# Altium PCB PCB_conectores.PcbDoc
Units mm, origin at the board's own origin, x right, y up, seen from the top; angles counter-clockwise.
Board outline 50 x 50 mm, 2 copper layers (Top Layer, Bottom Layer); 17 components, 10 nets, 62 pads, 16 vias.
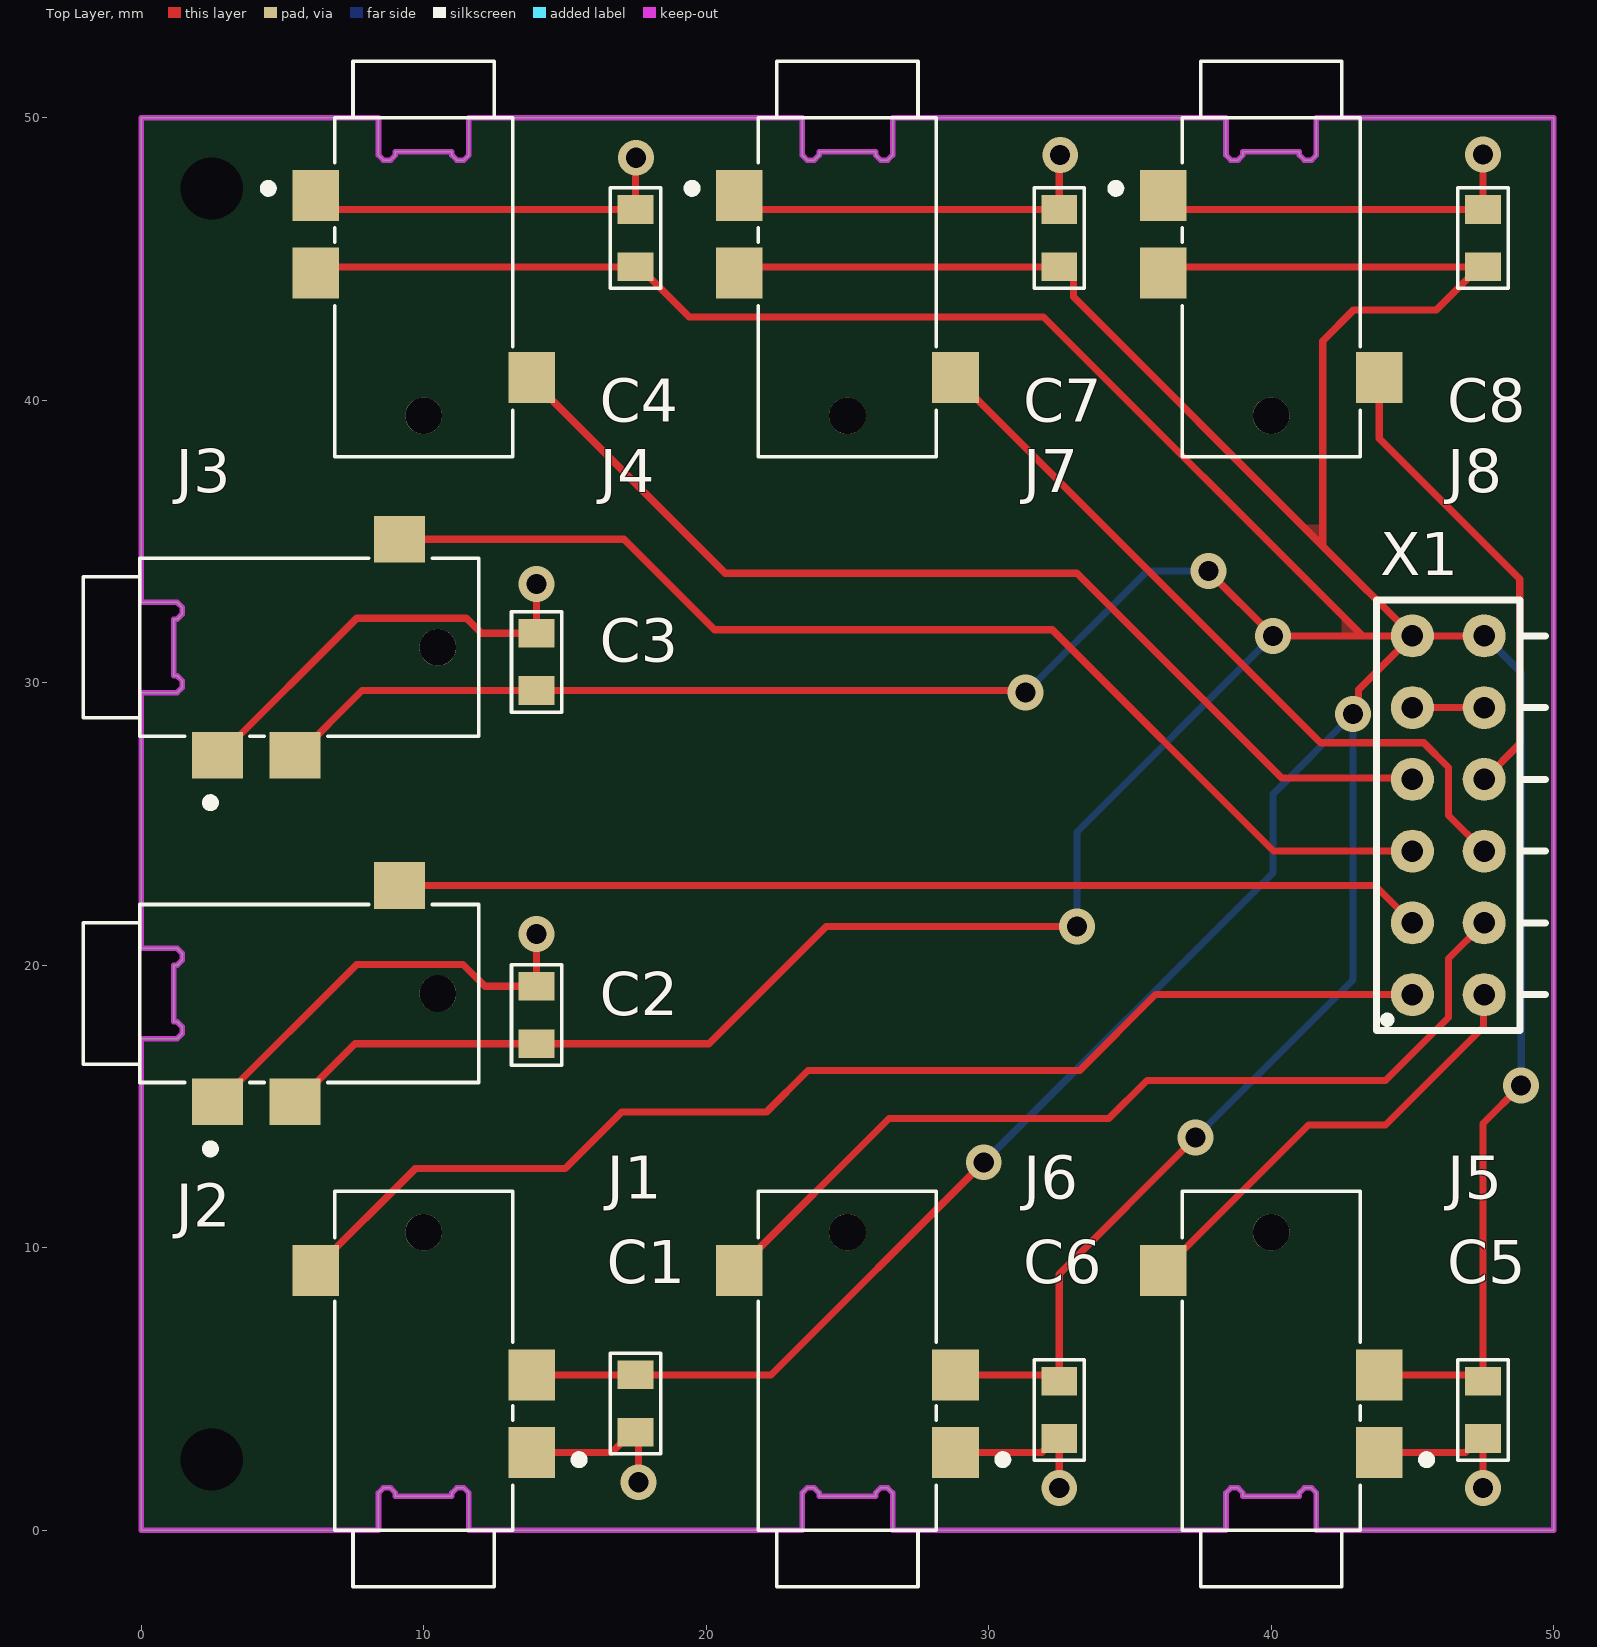
[diagram p0: Top Layer view]
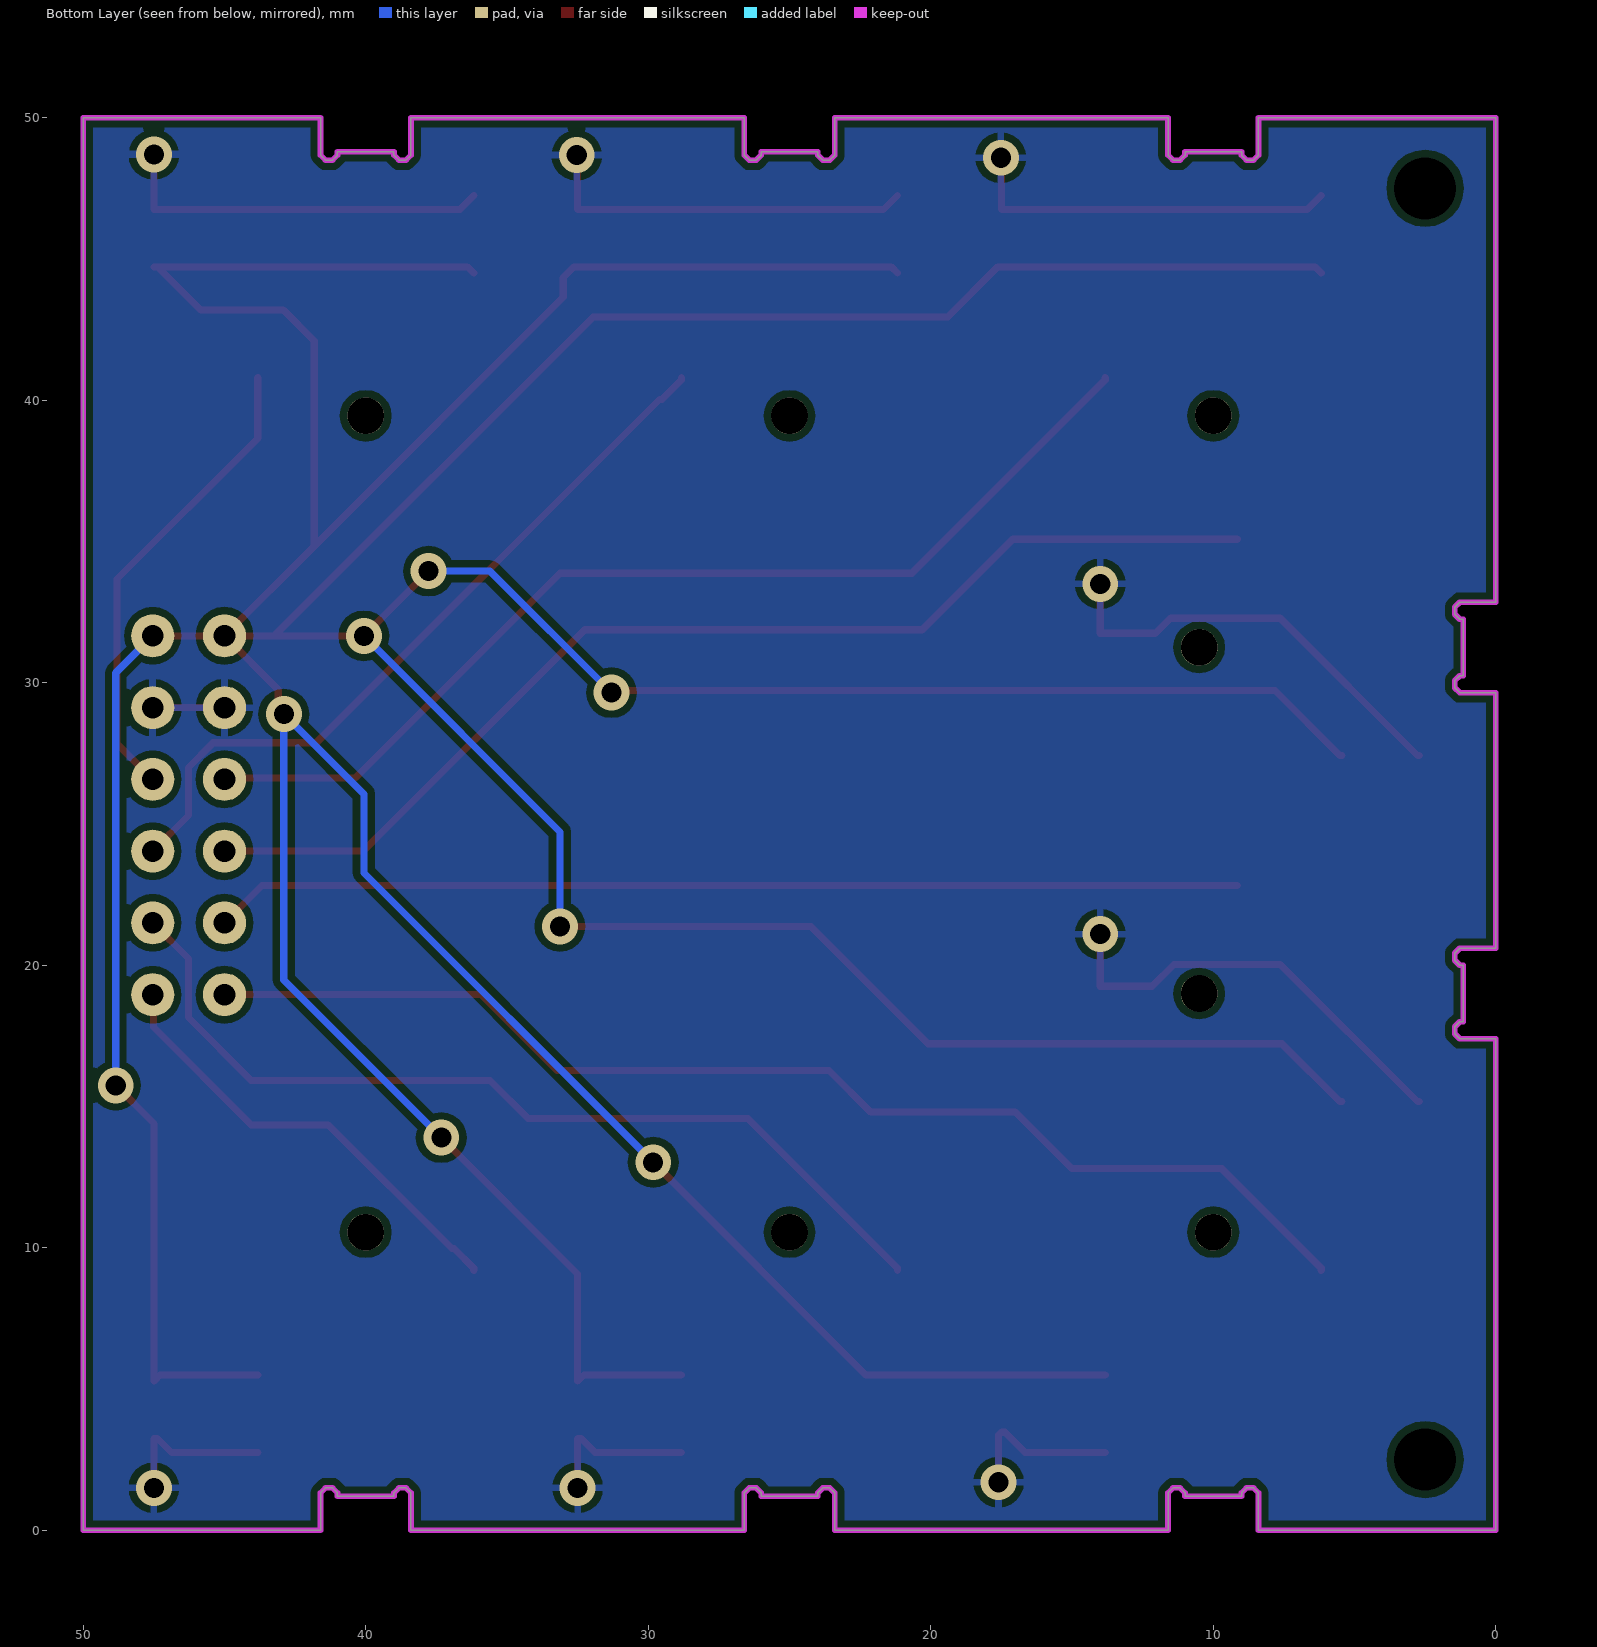
[diagram p1: Bottom Layer view, seen from below]

## Layer stack, top to bottom
Top Solder: solder mask 0.0102, Solder Resist, Dk 3.5
Top Layer: signal copper 0.0356
Dielectric 1: dielectric 0.32, FR-4, Dk 4.8
Bottom Layer: signal copper 0.0356
Bottom Solder: solder mask 0.0102, Solder Resist, Dk 3.5

## Board outline
8.4,50 8.4,48.675 8.575,48.5 8.825,48.5 9,48.675 9,48.8 11,48.8 11,48.675 11.175,48.5 11.425,48.5 11.6,48.675 11.6,50 23.4,50 23.4,48.675 23.575,48.5 23.825,48.5 24,48.675 24,48.8 26,48.8 26,48.675 26.175,48.5 26.425,48.5 26.6,48.675 26.6,50 38.4,50 38.4,48.675 38.575,48.5 38.825,48.5 39,48.675 39,48.8 41,48.8 41,48.675 41.175,48.5 41.425,48.5 41.6,48.675 41.6,50 50,50 50,0 41.6,0 41.6,1.325 41.425,1.5 41.175,1.5 41,1.325 41,1.2 39,1.2 39,1.325 38.825,1.5 38.575,1.5 38.4,1.325 38.4,0 26.6,0 26.6,1.325 26.425,1.5 26.175,1.5 26,1.325 26,1.2 24,1.2 24,1.325 23.825,1.5 23.575,1.5 23.4,1.325 23.4,0 11.6,0 11.6,1.325 11.425,1.5 11.175,1.5 11,1.325 11,1.2 9,1.2 9,1.325 8.825,1.5 8.575,1.5 8.4,1.325 8.4,0 0,0 0,17.4 1.275,17.4 1.45,17.575 1.45,17.825 1.275,18 1.15,18 1.15,20 1.275,20 1.45,20.175 1.45,20.425 1.275,20.6 0,20.6 0,29.65 1.275,29.65 1.45,29.825 1.45,30.075 1.275,30.25 1.15,30.25 1.15,32.25 1.275,32.25 1.45,32.425 1.45,32.675 1.275,32.85 0,32.85 0,50

## Design rules (kind name [scope] priority, off if disabled: settings)
Clearance [All] p1: gap=0.089 ignorepadtopadclearanceinfootprint=FALSE
PolygonConnect [All] p1: connectstyle=Relief reliefconductorwidth=0.254 reliefentries=4 polygonreliefangle="90 Angle" airgapwidth=0.254
RoutingVias [All] p1: holewidth=0.711 width=1.27 viastyle="Through Hole" minholewidth=0.711 minwidth=1.27 maxholewidth=0.711 maxwidth=1.27
SolderMaskExpansion [All] p1: expansion=0.102 istentingtop=FALSE
Width [All] p1: maxlimit=0.254 minlimit=0.254 preferedwidth=0.254
30 further rules are at their usual default settings.

## Components (designator, comment, footprint, x,y, rotation, side; value= is the part's Value field where it differs from the comment)
C1 "1u" 0805C-GENERIC 17.5,3.722 r90 top
C2 "1u" 0805C-GENERIC 14,19 r270 top
C3 "1u" 0805C-GENERIC 14,31.5 r270 top
C4 "1u" 0805C-GENERIC 17.5,46.5 r270 top
C5 "1u" 0805C-GENERIC 47.5,3.5 r90 top
C6 "1u" 0805C-GENERIC 32.5,3.5 r90 top
C7 "1u" 0805C-GENERIC 32.5,46.5 r270 top
C8 "1u" 0805C-GENERIC 47.5,46.5 r270 top
J1 "SJ2-35953A-SMT-TR" CUI_SJ2-35953A-SMT-TR 10,6 r90 top
J2 "SJ2-35953A-SMT-TR" CUI_SJ2-35953A-SMT-TR 5.95,19 r0 top
J3 "SJ2-35953A-SMT-TR" CUI_SJ2-35953A-SMT-TR 5.95,31.254 r0 top
J4 "SJ2-35953A-SMT-TR" CUI_SJ2-35953A-SMT-TR 10,44 r270 top
J5 "SJ2-35953A-SMT-TR" CUI_SJ2-35953A-SMT-TR 40,6 r90 top
J6 "SJ2-35953A-SMT-TR" CUI_SJ2-35953A-SMT-TR 25,6 r90 top
J7 "SJ2-35953A-SMT-TR" CUI_SJ2-35953A-SMT-TR 25,44 r270 top
J8 "SJ2-35953A-SMT-TR" CUI_SJ2-35953A-SMT-TR 40,44 r270 top
X1 "PMOD" PMOD 45,21.5 r0 top

## Footprints (in the part's own frame and the unit in brackets; to place one, negate y for a bottom-side part, rotate by r counter-clockwise, add the part's x,y. Pads: shape width x height; smd on the part's side, far side on the other; paste and mask are expansions set on the pad)
0805C-GENERIC [mil] "CAPACITOR 0805"
  rect 40x50 smd: 1(-10,0) 2(70,0)
  silkscreen extent -40,-35 100,35, body extent -11,-25 70,25, height 26
CUI_SJ2-35953A-SMT-TR [mm]
  rect 1.8x1.65 smd: 1(-3.25,-3.825) 2(3.2,3.825) 3(-0.5,-3.825)
  round 1.3 hole 1.3 unplated: ""(4.55,0)
  silkscreen extent -8,-5.65 6,3.15
PMOD [mil]
  round 60 hole 30: 1(0,-100) 2(0,0) 3(0,100) 4(0,200) 5(0,300) 6(0,400) 7(100,-100) 8(100,0) 9(100,100) 10(100,200) 11(100,300) 12(100,400)
  silkscreen extent -50,-150 185,450

## Part data
C1 C2 C3 C4 C5 C6 C7 C8: library part C0805-GENERIC, "GENERIC CAPACITOR NON POLARISED0603"
J1 J2 J3 J4 J5 J6 J7 J8: "3.5 mm, Stereo, Right Angle, Surface Mount _SMT_, Audio Jack Connector", Package=None, Availability=Unavailable, CUI_purchase_URL=https://www.cuidevices.com/product/interconnect/connectors/audio-connectors/jacks/sj2-3595x-smt-series?utm_source=snapeda.com&utm_medium=referral&utm_campaign=snapedaBOM, MF="CUI Devices", MP=SJ2-35953A-SMT-TR, Price=None, SnapEDA_Link=https://www.snapeda.com/parts/SJ2-35953A-SMT-TR/CUI%20Devices/view-part/701771/?ref=snap

## Free pads (board coordinates)
  round 1.524 hole 2.2 unplated: ""(2.5,2.5) ""(2.5,47.5)

## Via types
v1: diameter 1.27, hole 0.711, Top Layer to Bottom Layer, 16 vias

## Nets (pads, with @x,y where several pads share a name; then routed paths per layer and width w, separated by ;. In a path a pad name is that pad's centre, name@x,y a point inside that pad or via, vN(x,y) a via of type N, cw(c..) or ccw(c..) an arc to the next point about the centre after c; other vN are vias at no path point)
GND: C1.1 C2.1 C3.1 C4.1 C5.1 C6.1 C7.1 C8.1 J1.1 J2.1 J3.1 J4.1 J5.1 J6.1 J7.1 J8.1 X1.5 X1.11 | length 90.6
  Top Layer w0.254: J2.1 2.775,15.175 7.631,20.031 11.394,20.031 12.171,19.254 C2.1 v1(14,21.1) ; J3.1 2.775,27.429 7.631,32.285 11.517,32.285 12.048,31.754 C3.1 v1(14,33.5) ; J4.1 6.671,46.754 C4.1 17.5,48.564 v1(17.52,48.584) ; J1.1 16.655,2.75 17.373,3.468 C1.1 17.6,3.368 v1(17.6,1.7) ; J7.1 21.671,46.754 C7.1 32.5,48.643 v1(32.532,48.675) ; J6.1 31.877,2.75 32.373,3.246 C6.1 v1(32.5,1.5) ; J8.1 36.671,46.754 C8.1 v1(47.5,48.7) ; J5.1 46.877,2.75 47.373,3.246 C5.1 v1(47.5,1.5) ; X1.5 X1.11
NetJ1_2: J1.2 X1.1 | length 42.9
  Top Layer w0.254: J1.2 6.175,9.275 9.7,12.8 15,12.8 17,14.8 22.125,14.8 23.6,16.275 33.225,16.275 35.91,18.96 X1.1
NetJ2_2: J2.2 X1.2 | length 36.4
  Top Layer w0.254: J2.2 43.675,22.825 X1.2
NetJ3_2: J3.2 X1.3 | length 40.4
  Top Layer w0.254: J3.2 17.096,35.079 20.3,31.875 32.25,31.875 40.085,24.04 X1.3
NetJ4_2: J4.2 X1.4 | length 37.1
  Top Layer w0.254: J4.2 13.825,40.725 20.675,33.875 33.125,33.875 40.375,26.625 44.955,26.625 X1.4
NetJ5_2: J5.2 X1.7 | length 16.1
  Top Layer w0.254: J5.2 36.175,9.275 36.873,9.973 36.948,9.973 41.325,14.35 44.05,14.35 47.517,17.817 47.517,18.937 X1.7
NetJ6_2: J6.2 X1.8 | length 32.7
  Top Layer w0.254: J6.2 21.175,9.275 26.475,14.575 34.25,14.575 35.6,15.925 44.05,15.925 46.275,18.15 46.275,20.235 X1.8
NetJ7_2: J7.2 X1.9 | length 26.7
  Top Layer w0.254: J7.2 28.825,40.725 29.523,40.027 29.598,40.027 41.75,27.875 45.4,27.875 46.275,27 46.275,25.305 X1.9
NetJ8_2: J8.2 X1.10 | length 16.8
  Top Layer w0.254: J8.2 43.825,38.65 48.8,33.675 48.8,27.84 X1.10
VCC: C1.2 C2.2 C3.2 C4.2 C5.2 C6.2 C7.2 C8.2 J1.3 J2.3 J3.3 J4.3 J5.3 J6.3 J7.3 J8.3 X1.6 X1.12 | length 293.8
  Top Layer w0.254: J2.3 5.525,15.175 7.572,17.222 C2.2 20.097,17.222 24.25,21.375 v1(33.125,21.375) ; J3.3 5.525,27.429 7.818,29.722 C3.2 31.228,29.722 v1(31.3,29.65) ; J4.3 6.397,44.722 C4.2 17.627,44.722 19.399,42.95 31.945,42.95 43.235,31.66 ; J1.3 C1.2 22.3,5.5 v1(29.825,13.025) ; J7.3 21.397,44.722 C7.2 32.627,44.722 33.008,44.341 33.008,43.652 41.825,34.835 ; J6.3 32.278,5.5 C6.2 32.5,9.075 v1(37.325,13.9) ; J8.3 36.397,44.722 C8.2@47.373,44.722 ; v1(37.775,33.95) v1(40.065,31.66) 43.235,31.66 ; v1(42.9,28.891) 43.094,29.085 43.094,29.754 X1.6 ; J5.3 47.278,5.5 C5.2 47.5,14.4 v1(48.85,15.75) ; C8.2 C8.2@47.373,44.722 ; X1.12 X1.6 ; 41.825,34.835 X1.6 ; 41.825,34.835 41.825,42.101 42.924,43.2 45.851,43.2 C8.2@47.373,44.722 ; 43.235,31.66 X1.6
  Bottom Layer w0.254: v1(29.825,13.025) 40.065,23.265 40.065,26.056 v1(42.9,28.891) 42.9,19.475 v1(37.325,13.9) ; v1(31.3,29.65) 35.6,33.95 v1(37.775,33.95) ; v1(33.125,21.375) 33.125,24.72 v1(40.065,31.66) ; X1.12 48.85,30.35 v1(48.85,15.75)
pads on no net: J1. J2. J3. J4. J5. J6. J7. J8.

## Polygon pours and split planes (outlines as drawn)
GND on Bottom Layer "GND_L02_P002" (solid, remove dead copper, pour order 2): 0,50 50,50 50,0 0,0
VCC on Top Layer "VCC_L01_P004" (solid, remove dead copper, pour order 4): 42.5,32.4 42.5,31.6 43.3,31.6
VCC on Top Layer "VCC_L01_P003" (solid, remove dead copper, pour order 3): 41.1,35.6 41.8,35.6 41.8,34.9

## Keep-outs
Keep-Out Layer:
  the board outline again, w0.2